# Altium PCB Ad Hoc Radio Node 2005.PCBDOC
Units mm, origin at the board's own origin, x right, y up, seen from the top; angles counter-clockwise.
Board outline 127 x 101.6 mm, 4 copper layers (Top Layer, Internal Plane 1, Internal Plane 2, Bottom Layer); 64 components, 54 nets, 239 pads, 29 vias.
Unrouted connection lines stored in the file: 4.
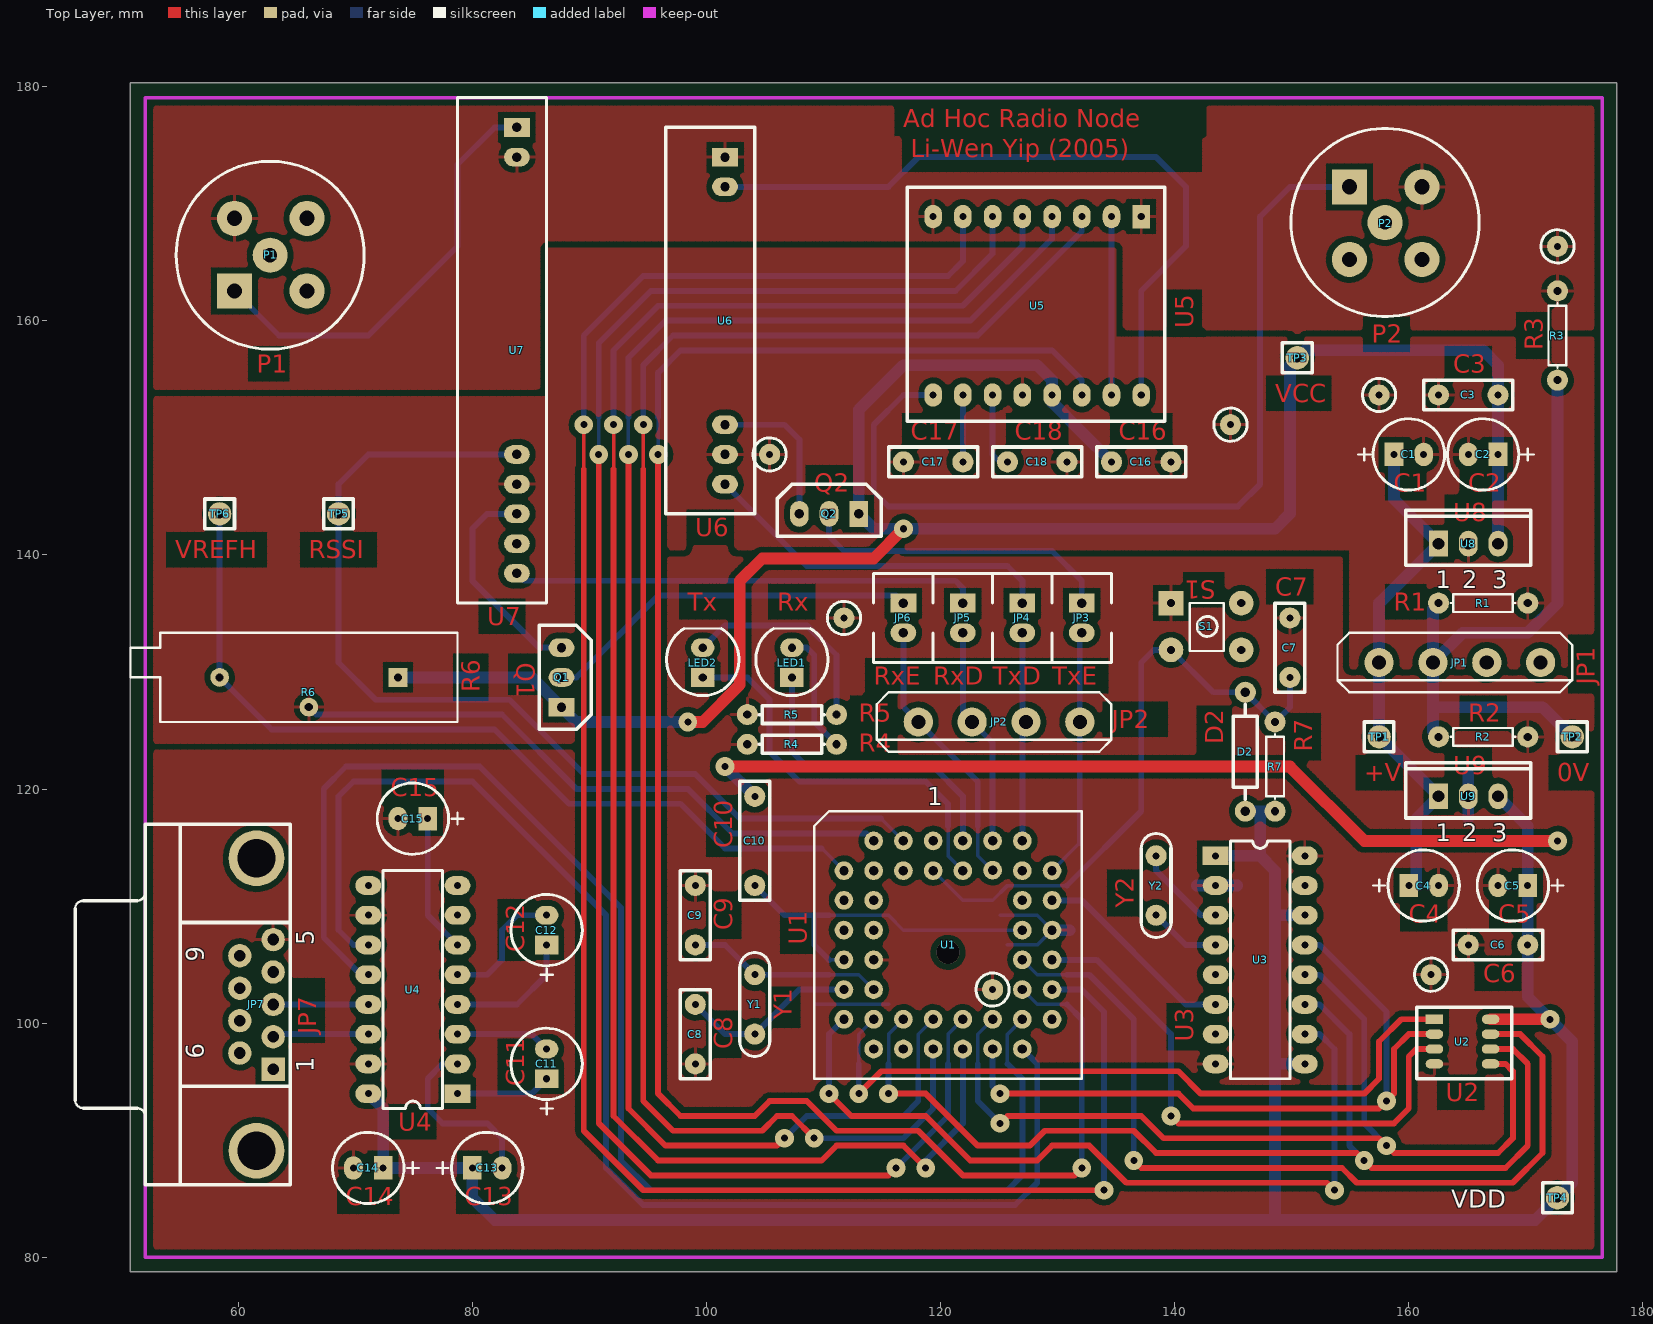
[diagram p0: Top Layer view]
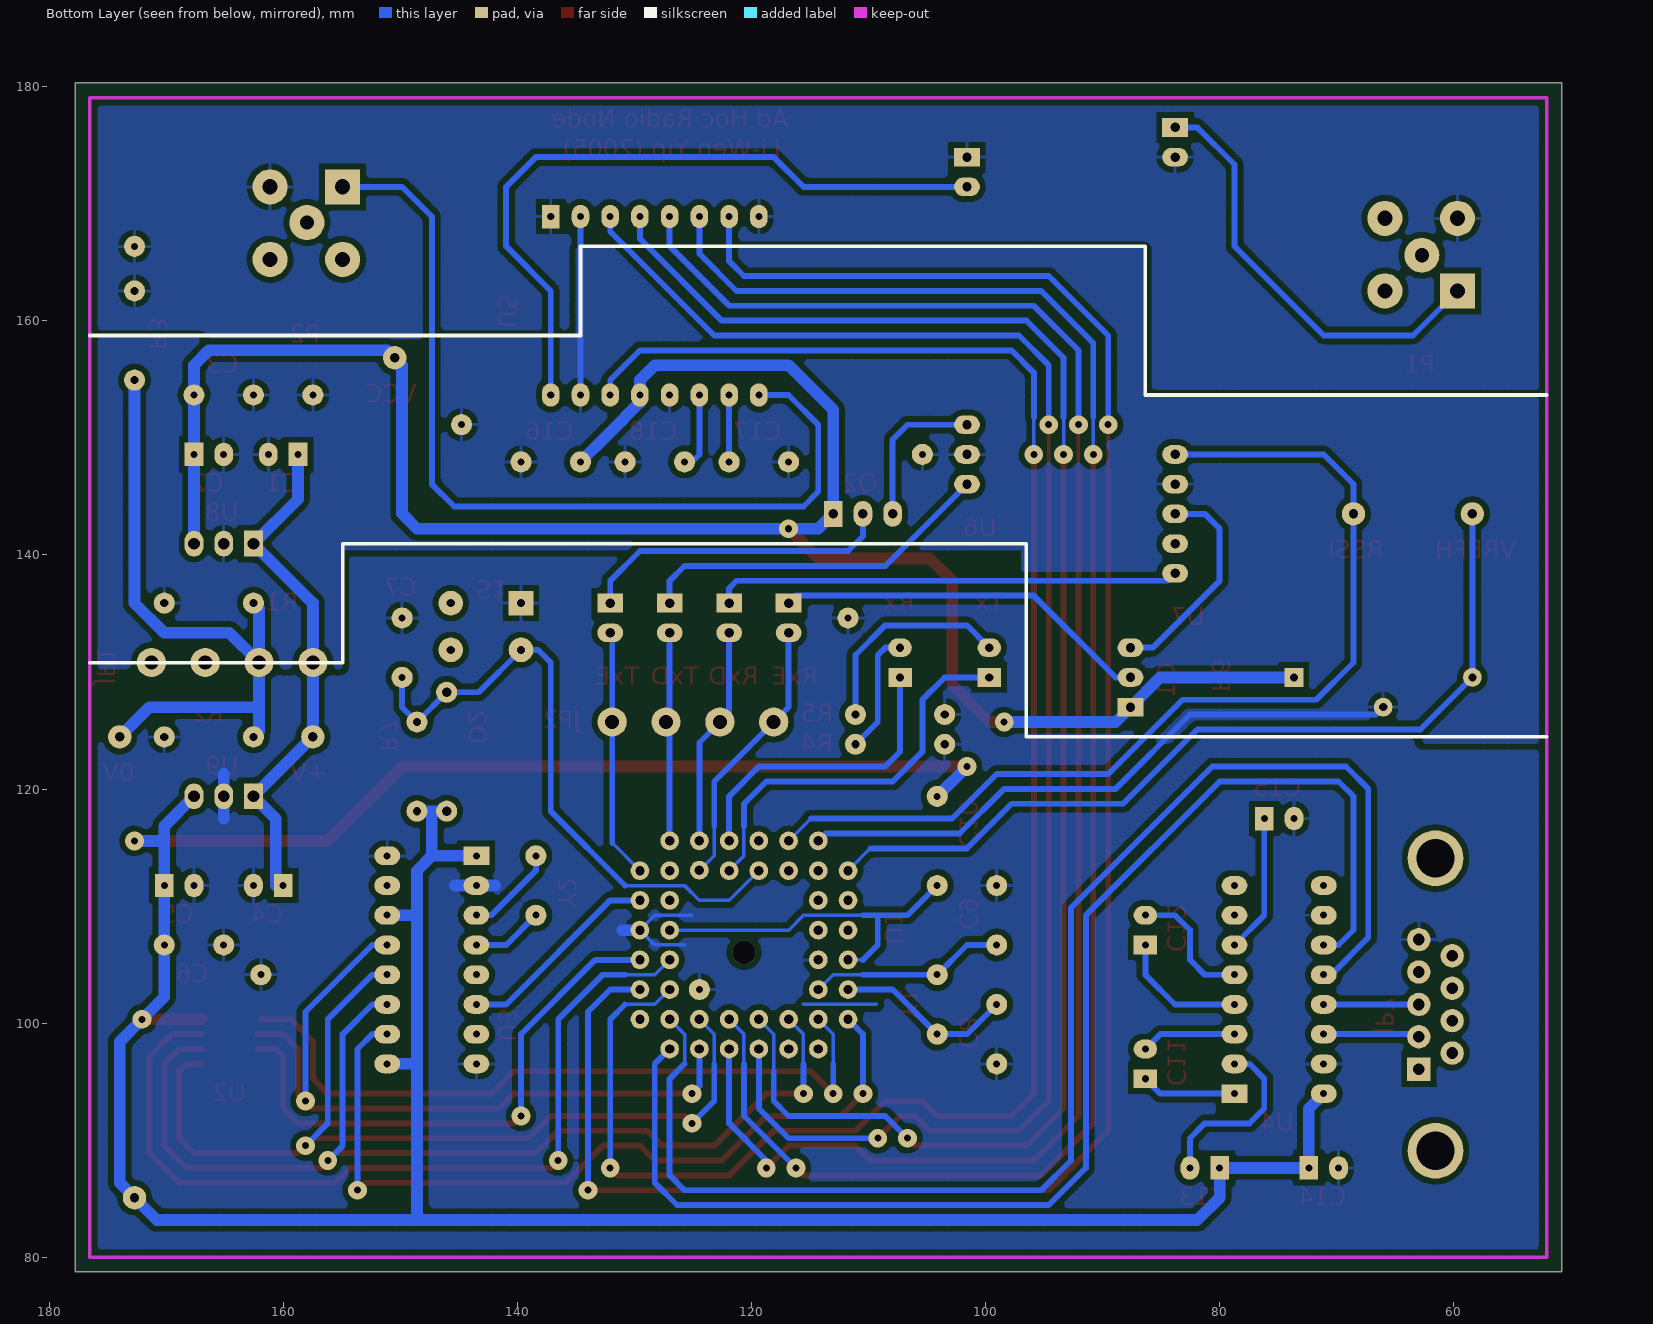
[diagram p1: Bottom Layer view, seen from below]
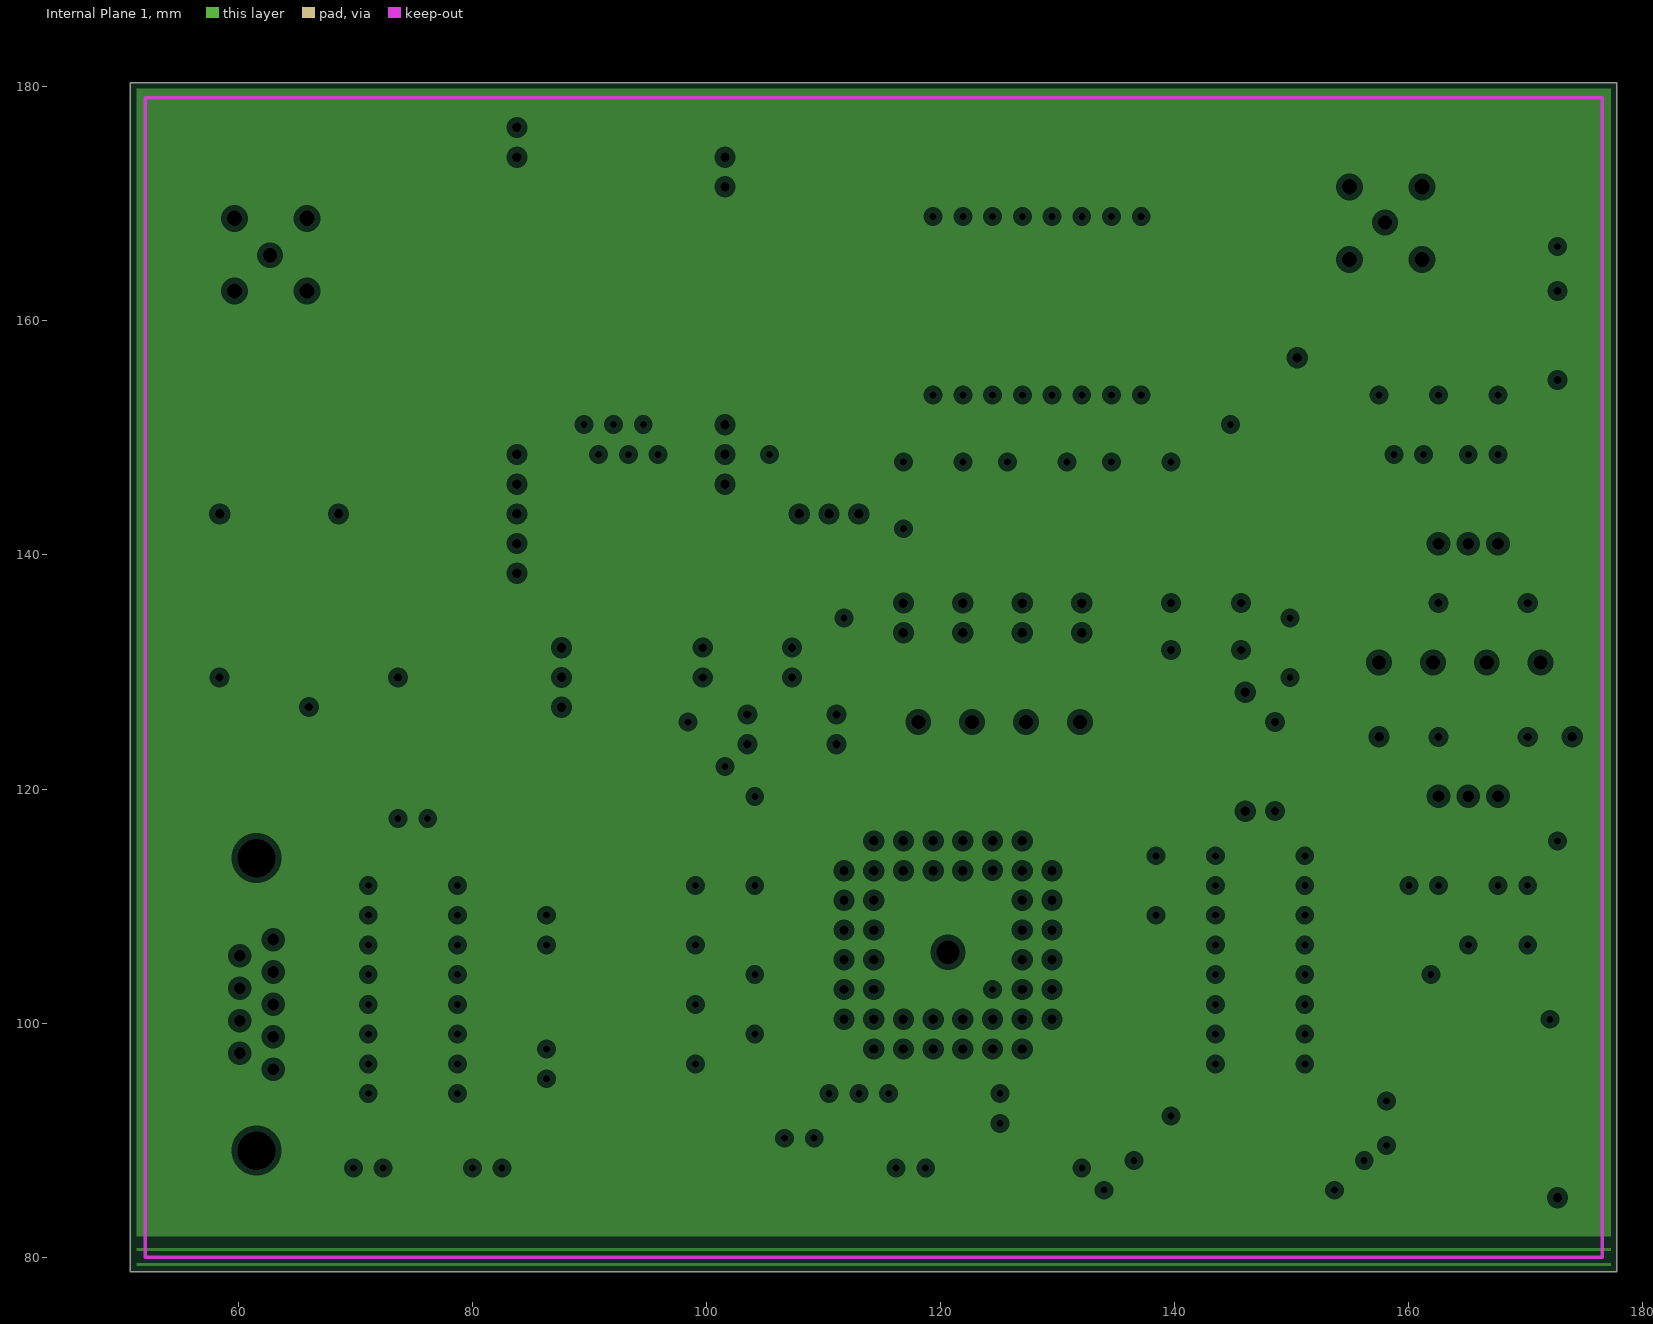
[diagram p2: Internal Plane 1, clearances drawn from the general rule]
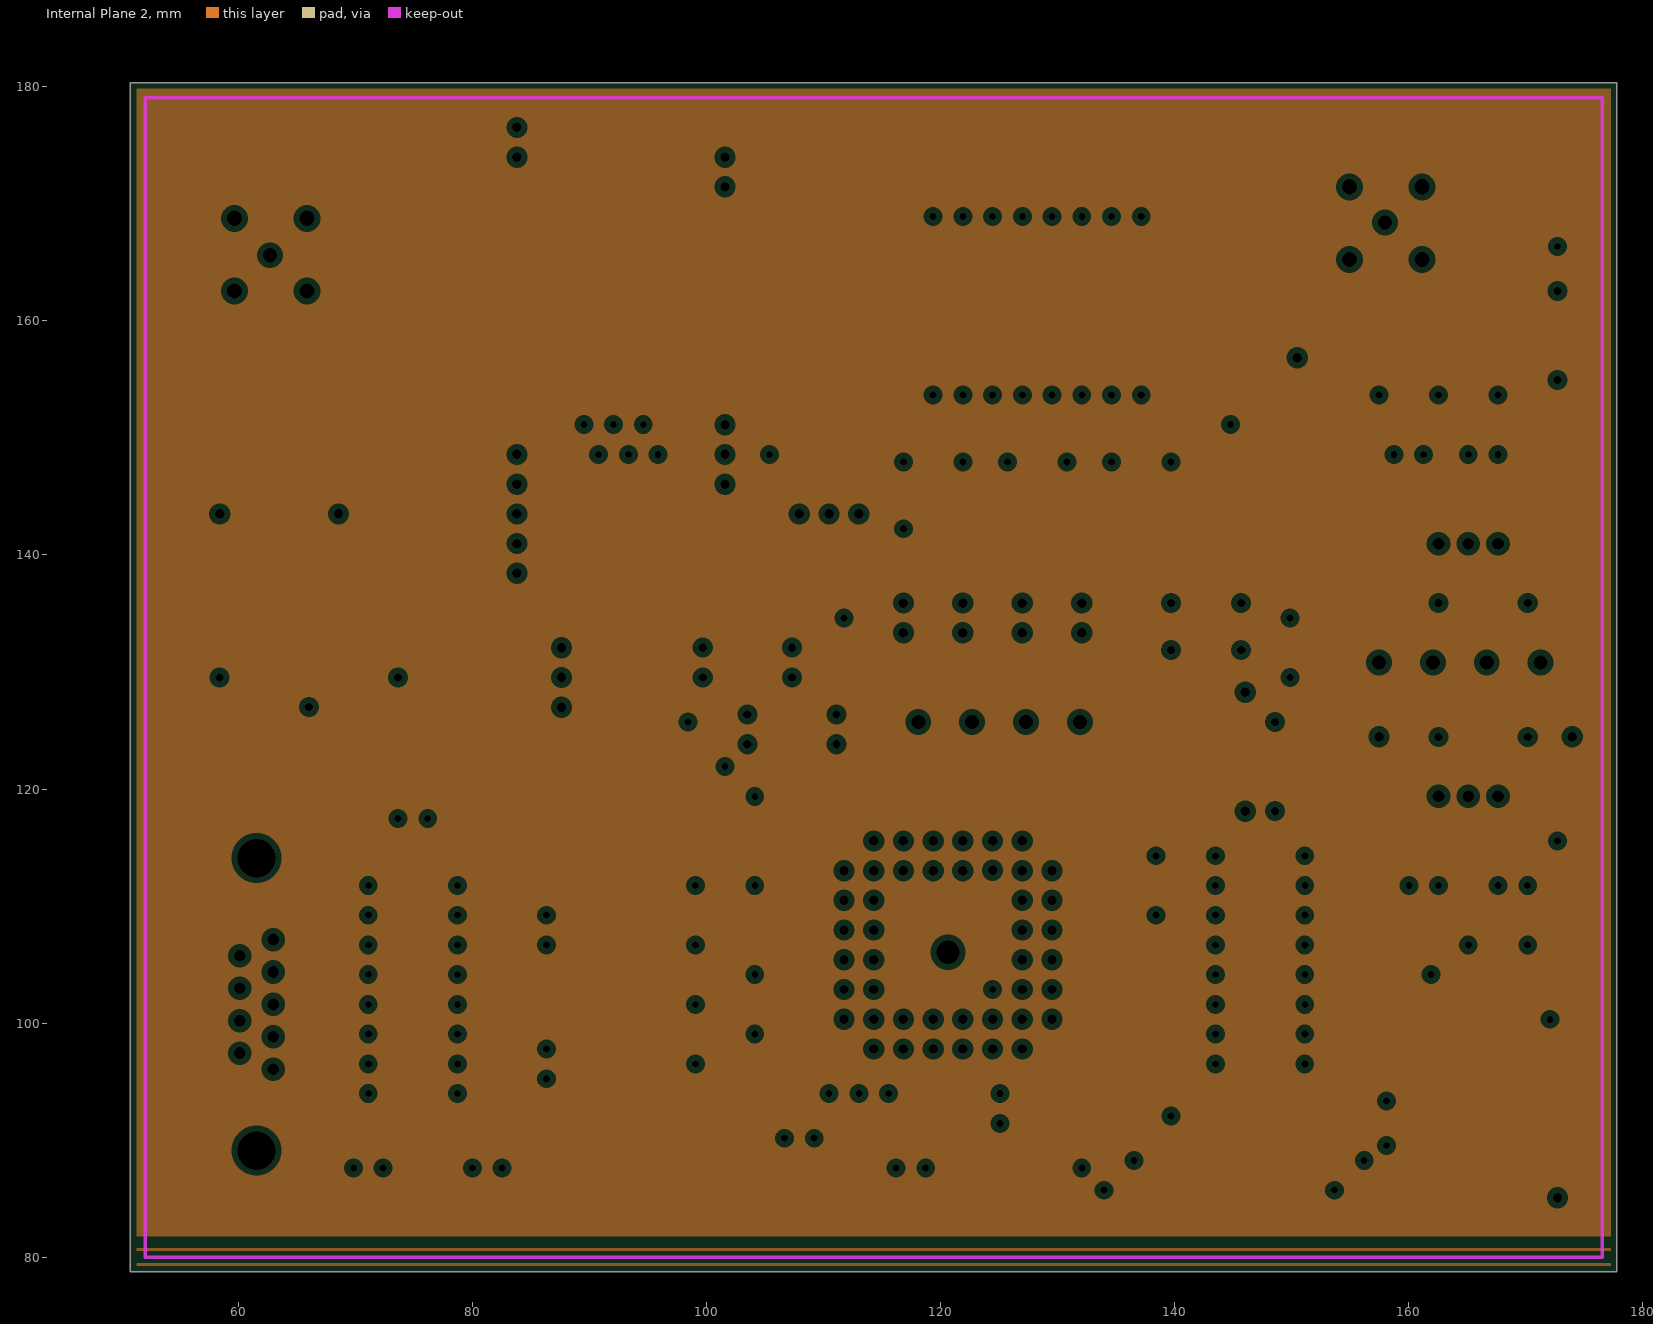
[diagram p3: Internal Plane 2, clearances drawn from the general rule]

## Layer stack, top to bottom
Top Layer: signal copper 0.0356
Dielectric: dielectric 0.32, FR-4, Dk 4.8
Internal Plane 1: plane copper 0.0356
Dielectric: dielectric 0.32, FR-4, Dk 4.8
Internal Plane 2: plane copper 0.0356
Dielectric: dielectric 0.32, FR-4, Dk 4.8
Bottom Layer: signal copper 0.0356

## Board outline
50.8,78.74 177.8,78.74 177.8,180.34 50.8,180.34

## Design rules (kind name [scope] priority, off if disabled: settings)
Clearance [All] p1: gap=0.5
ComponentClearance [All] p1: gap=0.254 collisioncheckmode=0
PlaneClearance [All] p1: clearance=0.508
PlaneConnect [All] p1: planeconnectstyle=Relief reliefexpansion=0.508 reliefentries=4 reliefconductorwidth=0.254 reliefairgap=0.254
PolygonConnect [All] p1: connectstyle=Relief reliefconductorwidth=0.254 reliefentries=4 polygonreliefangle="90 Angle"
RoutingLayers [All] p1: top layer=Horizontal bottom layer=Vertical
RoutingVias [All] p1: holewidth=0.711 width=1.27 viastyle="Through Hole" minholewidth=0.711 minwidth=1.27 maxholewidth=0.711 maxwidth=1.27
SolderMaskExpansion [All] p1: expansion=0.102
TestPointUsage [All] p1: valid=0 allowmultiple=FALSE
Testpoint [All] p1: side=15 testpointundercomponent=TRUE minsize=1.016 maxsize=2.54 preferedsize=1.524 minholesize=0 maxholesize=1.016 preferedholesize=0.813 testpointgrid=0.025 style=1023 order=1234567890
Width [All] p1: maxlimit=1.27 minlimit=0.3 preferedwidth=0.305 toplayer_prefwidth=0.5 bottomlayer_prefwidth=0.3 minimp=50.000000 maximp=50.000000 favimp=50.000000
14 further rules are at their usual default settings.

## Classes and differential pairs
component class "Ad Hoc Radio Node 2005": C1 C2 C3 C4 C5 C6 C7 C8 C9 C10 C11 C12 C13 C14 C15 C16 C17 C18 D2 JP1 JP2 JP3 JP4 JP5 JP6 JP7 LED1 LED2 P1 P2 Q1 Q2 R1 R2 R3 R4 R5 R6 R7 R9 R10 S1 TP1 TP2 TP3 TP4 TP5 TP6 U1 U2 U3 U4 U5 U6 U7 U8 U9 Y1 Y2

## Components (designator, comment, footprint, x,y, rotation, side; value= is the part's Value field where it differs from the comment)
C1 "Cap" "0.1 ELECTRO CAP" 158.75,148.59 r0 top
C2 "Cap" "0.1 ELECTRO CAP" 167.64,148.59 r180 top
C3 "Cap" "0.2 BOX CAP" 162.56,156.21 r180 top
C4 "Cap" "0.1 RAD CAP" 160.02,111.76 r0 top
C5 "Cap" "0.1 RAD CAP" 170.18,111.76 r180 top
C6 "Cap" "0.2 BOX CAP" 165.1,109.22 r180 top
C7 "0.1uF" "0.2 BOX CAP" 152.4,134.62 r90 top
C8 "Cap" "0.2 BOX CAP" 101.6,101.6 r90 top
C9 "Cap" "0.2 BOX CAP" 96.52,106.68 r270 top
C10 "" "0.3 BOX CAP" 101.6,114.3 r270 top
C11 "Cap2" "0.1 RAD CAP" 86.36,95.25 r90 top
C12 "Cap2" "0.1 RAD CAP" 86.36,106.68 r90 top
C13 "Cap2" "0.1 RAD CAP" 80.01,87.63 r0 top
C14 "Cap2" "0.1 RAD CAP" 72.39,87.63 r180 top
C15 "Cap2" "0.1 RAD CAP" 76.2,117.475 r180 top
C16 "" "0.2 BOX CAP" 134.62,150.495 r180 top
C17 "" "0.2 BOX CAP" 116.84,150.495 r180 top
C18 "" "0.2 BOX CAP" 130.81,145.415 r0 top
D2 "1N914" AXIAL-0.4 146.05,123.19 r270 top
JP1 "Header 4" "4 WAY TERMINAL BLOCK" 157.48,130.81 r0 top
JP2 "Header 4" "4 WAY TERMINAL BLOCK" 118.11,125.73 r0 top
JP3 "TxE" PCBCOMPONENT_1 132.08,135.89 r270 top
JP4 "TxD" PCBCOMPONENT_1 127,135.89 r270 top
JP5 "RxD" PCBCOMPONENT_1 121.92,135.89 r270 top
JP6 "RxE" PCBCOMPONENT_1 116.84,135.89 r270 top
JP7 "D Connector 9" DSUB1.385-2H9 52.07,101.6 r90 top
LED1 "Rx" "STD LED" 107.315,129.54 r90 top
LED2 "Tx" "STD LED" 99.695,129.54 r90 top
P1 "BNC" "PCB BNC CONNECTOR - DUPLICATE" 59.69,162.56 r90 top
P2 "BNC" "PCB BNC CONNECTOR - DUPLICATE" 154.94,171.45 r0 top
Q1 "MOSFET-P" MOSFET 87.63,132.08 r90 top
Q2 "MOSFET-P" MOSFET 107.95,143.51 r180 top
R1 "" AXIAL-0.3 166.37,135.89 r0 top
R2 "" AXIAL-0.3 166.37,124.46 r0 top
R3 "" AXIAL-0.3 172.72,158.75 r90 top
R4 "" AXIAL-0.3 107.315,123.825 r180 top
R5 "" AXIAL-0.3 107.315,126.365 r180 top
R6 "Res1" VR2 66.04,128.27 r180 top
R7 "Res1" AXIAL-0.3 148.59,121.92 r270 top
S1 "SW-PB" "RESET SWITCH - DUPLICATE" 139.7,135.89 r0 top
TP1 "+V" TESTPOINT 154.94,124.46 r0 top
TP2 "0V" TESTPOINT 171.45,124.46 r0 top
TP3 "VCC" TESTPOINT 147.955,156.845 r0 top
TP4 "VDD" TESTPOINT 170.18,85.09 r0 top
TP5 "RSSI" TESTPOINT 66.04,143.51 r0 top
TP6 "VREFH" TESTPOINT 55.88,143.51 r0 top
U1 "PIC18C452_PLCC" "PIC18C452_PLCC - DUPLICATE" 111.76,115.57 r0 top
U2 "FRAM" "Ramtron FRAM" 162.205,100.33 r0 top
U3 "DS1306" DIP-16 143.51,114.3 r0 top
U4 "MAX232EPE" DIP-16 78.74,93.98 r180 top
U5 "" DIP16-ADAPTOR 137.16,168.91 r270 top
U6 "T7 NBFM TRANSMITTER" T7 101.6,173.99 r270 top
U7 "R7 NBFM RECEIVER" "R7 NBFM RECEIVER" 83.82,176.53 r270 top
U8 "LM340T5.0" SFM-T3/A4.7V 165.1,140.97 r0 top
U9 "LM340T5.0" SFM-T3/A4.7V 165.1,119.38 r0 top
Y1 "XTAL" XTAL 104.14,99.06 r90 top
Y2 "XTAL" XTAL 138.43,114.3 r270 top
? "" GROUNDVIA 111.76,134.62 r0 top
? "" GROUNDVIA 124.46,102.87 r0 top
? "" GROUNDVIA 161.925,104.14 r0 top
? "" GROUNDVIA 105.41,148.59 r0 top
? "" GROUNDVIA 144.78,151.13 r0 top
? "" GROUNDVIA 157.48,153.67 r0 top
? "" GROUNDVIA 172.72,166.37 r0 top

## Footprints (in the part's own frame and the unit in brackets; to place one, negate y for a bottom-side part, rotate by r counter-clockwise, add the part's x,y. Pads: shape width x height; smd on the part's side, far side on the other; paste and mask are expansions set on the pad)
"0.1 ELECTRO CAP" [mm] "Electrolytic Cap"
  rect 1.6x2 hole 0.6: 1(0,0)
  oval 1.6x2 hole 0.6: 2(2.54,0)
  silkscreen extent -3.05,-3.05 4.32,3.05
"0.1 RAD CAP" [mm] "Electrolytic Cap"
  rect 1.6x2 hole 0.6: 1(0,0)
  oval 1.6x2 hole 0.6: 2(2.54,0)
  silkscreen extent -3.05,-3.05 4.32,3.05
"0.2 BOX CAP" [mm]
  round 1.8 hole 0.6: 1(-5.08,2.54) 2(0,2.54)
  silkscreen extent -6.35,1.27 1.27,3.81
"0.3 BOX CAP" [mm]
  round 1.8 hole 0.6: 1(-5.08,2.54) 2(2.54,2.54)
  silkscreen extent -6.35,1.27 3.81,3.81
"4 WAY TERMINAL BLOCK" [mm]
  round 2.5 hole 1.2: 1(0,0) 2(4.6,0) 3(9.2,0) 4(13.8,0)
  silkscreen extent -3.56,-2.54 16.5,2.54
AXIAL-0.3 [mm]
  round 1.8 hole 0.7: 1(-3.81,0) 2(3.81,0)
  silkscreen extent -2.77,-0.76 2.77,0.76
AXIAL-0.4 [mm]
  round 1.8 hole 0.8: 1(-5.08,0) 2(5.08,0)
  silkscreen extent -4.06,-1.02 4.06,1.02
DIP16-ADAPTOR [mm]
  rect 2x1.5 hole 0.6: 1(0,0)
  oval 2x1.5 hole 0.6: 2(0,-2.54) 3(0,-5.08) 4(0,-7.62) 5(0,-10.16) 6(0,-12.7) 7(0,-15.24) 8(0,-17.78) 9(15.24,-17.78) 10(15.24,-15.24) 11(15.24,-12.7) 12(15.24,-10.16) 13(15.24,-7.62) 14(15.24,-5.08) 15(15.24,-2.54) 16(15.24,0)
  silkscreen extent -2.5,-20 17.5,2
DIP-16 [mm]
  rect 2.2x1.6 hole 0.6: 1(0,0)
  oval 2.2x1.6 hole 0.6: 2(0,-2.54) 3(0,-5.08) 4(0,-7.62) 5(0,-10.16) 6(0,-12.7) 7(0,-15.24) 8(0,-17.78) 9(7.62,-17.78) 10(7.62,-15.24) 11(7.62,-12.7) 12(7.62,-10.16) 13(7.62,-7.62) 14(7.62,-5.08) 15(7.62,-2.54) 16(7.62,0)
  silkscreen extent 1.27,-19.05 6.35,1.27
DSUB1.385-2H9 [mm]
  rect 2x2 hole 1: 1(-5.54,-10.92)
  round 2 hole 1: 2(-2.77,-10.92) 3(0,-10.92) 4(2.77,-10.92) 5(5.54,-10.92) 6(-4.155,-8.08) 7(-1.385,-8.08) 8(1.385,-8.08) 9(4.155,-8.08)
  round 4.76 hole 3.26: 10(-12.495,-9.5) 11(12.495,-9.5)
  silkscreen extent -15.4,-12.4 15.4,6
GROUNDVIA [mm]
  round 1.8 hole 0.6: 1(0,0)
  silkscreen extent -1.42,-1.42 1.42,1.42
MOSFET [mm]
  rect 1.6x2.2 hole 0.8: 1(-5.08,0)
  oval 1.6x2.2 hole 0.8: 2(-2.54,0) 3(0,0)
  silkscreen extent -6.98,-2.54 1.91,1.91
"PCB BNC CONNECTOR - DUPLICATE" [mm]
  round 3 hole 1.2: 0(3.048,-3.048)
  rect 3x3 hole 1.3: 1(0,0)
  round 3 hole 1.3: 2(6.2,0) 3(0,-6.2) 4(6.2,-6.2)
  silkscreen extent -4.98,-11.08 11.08,4.98
PCBCOMPONENT_1 [mm]
  rect 1.6x2.2 hole 0.8: 1(0,0)
  oval 1.6x2.2 hole 0.8: 2(2.54,0)
  silkscreen extent -2.54,-2.54 5.08,2.54
"PIC18C452_PLCC - DUPLICATE" [mm]
  round 1.6 hole 0.8: 1(7.62,0) 2(7.62,-2.54) 3(5.08,0) 4(5.08,-2.54) 5(2.54,0) 6(0,-2.54) 7(2.54,-2.54) 8(0,-5.08) 9(2.54,-5.08) 10(0,-7.62) 11(2.54,-7.62) 12(0,-10.16) 13(2.54,-10.16) 14(0,-12.7) 15(2.54,-12.7) 16(0,-15.24) 17(2.54,-17.78) 18(2.54,-15.24) 19(5.08,-17.78) 20(5.08,-15.24) 21(7.62,-17.78) 22(7.62,-15.24) 23(10.16,-17.78) 24(10.16,-15.24) 25(12.7,-17.78) 26(12.7,-15.24) 27(15.24,-17.78) 28(17.78,-15.24) 29(15.24,-15.24) 30(17.78,-12.7) 31(15.24,-12.7) 32(17.78,-10.16) 33(15.24,-10.16) 34(17.78,-7.62) 35(15.24,-7.62) 36(17.78,-5.08) 37(15.24,-5.08) 38(17.78,-2.54) 39(15.24,0) 40(15.24,-2.54) 41(12.7,0) 42(12.7,-2.5) 43(10.16,0) 44(10.16,-2.54)
  silkscreen extent -2.54,-20.32 20.32,2.54
"R7 NBFM RECEIVER" [mm]
  rect 1.6x2.2 hole 0.8: 1(0,0)
  oval 1.6x2.2 hole 0.8: 2(2.54,0) 3(27.94,0) 4(30.48,0) 5(33.02,0) 6(35.56,0) 7(38.1,0)
  silkscreen extent -2.54,-5.08 40.64,2.54
"Ramtron FRAM" [mm]
  rect 1.5x0.8 smd: 1(0,0)
  oval 1.5x0.8 smd: 2(0,-1.27) 3(0,-2.54) 4(0,-3.81) 5(4.8,-3.81) 6(4.8,-2.54) 7(4.8,-1.27) 8(4.8,0)
  silkscreen extent -1.52,-5.08 6.6,1.02
"RESET SWITCH - DUPLICATE" [mm]
  rect 2.1x2.1 hole 0.7: 1(0,0)
  round 2.1 hole 0.7: 2(0,-4) ""(6,-4) ""(6,0)
  silkscreen extent 1.6,-4.1 4.5,0
SFM-T3/A4.7V [mm]
  rect 1.6x2.2 hole 1: 1(-2.54,0)
  oval 1.6x2.2 hole 1: 2(0,0) 3(2.54,0)
  silkscreen extent -5.35,-1.85 5.35,2.85
"STD LED" [mm]
  rect 1.6x2 hole 0.7: 1(0,0)
  oval 1.6x2 hole 0.7: 2(2.54,0)
  silkscreen extent -1.56,-3.09 4.17,3.09
T7 [mm]
  rect 1.6x2.2 hole 0.8: 1(0,0)
  oval 1.6x2.2 hole 0.8: 2(2.54,0) 3(22.86,0) 4(25.4,0) 5(27.94,0)
  silkscreen extent -2.54,-5.08 30.48,2.54
TESTPOINT [mm] "Test Point"
  round 2 hole 0.8: 1(2.54,0)
  silkscreen extent 1.27,-1.27 3.81,1.27
VR2 [mm]
  rect 1.6x1.6 hole 0.7: 1(-7.62,-1.27)
  round 1.6 hole 0.7: 2(0,1.27) 3(7.62,-1.27)
  silkscreen extent -12.7,-5.08 15.24,2.54
XTAL [mm] "Crystal"
  round 1.8 hole 0.6: 1(0,0) 2(5.08,0)
  silkscreen extent -1.9,-1.27 6.98,1.27

## Part data
C1 C2 C3 C4 C5 C6 C8 C9 C11 C12 C13 C15: "Capacitor"
C7: library part CAP, "Capacitor"
C10 C16 C17 C18: library part Cap, "Capacitor"
C14: library part "Cap Pol1", "Polarized Capacitor (Radial)"
D2: library part Diode, "Default Diode"
JP1 JP2: "Header, 4-Pin"
JP3 JP4 JP5 JP6: library part JUMPER
JP7: "Receptacle Assembly, 9 Position, Right Angle"
LED1 LED2: library part LED2, "Typical RED, GREEN, YELLOW, AMBER GaAs LED"
P1 P2: "BNC Elbow Connector"
Q1 Q2: "P-Channel MOSFET"
R1 R2 R3 R4 R5: library part Res1, "Resistor"
R6: library part RPot2, "Potentiometer"
R7: "Resistor"
S1: "Switch"
TP1 TP2 TP3 TP4 TP5 TP6: library part TESTPOINT, "Test Point"
U4: "+5V Powered RS-232 Driver/Receiver"
U5: library part AD8369_DIGITAL_CONT_PWR_AMP
U8 U9: "Series 3-Terminal Positive Regulator"
Y1 Y2: "Crystal Oscillator"

## Via types
v1: diameter 1.6, hole 0.6, Top Layer to Bottom Layer, 28 vias
v2: diameter 2, hole 2, Top Layer to Bottom Layer, 1 vias

## Nets (pads, with @x,y where several pads share a name; then routed paths per layer and width w, separated by ;. In a path a pad name is that pad's centre, name@x,y a point inside that pad or via, vN(x,y) a via of type N, cw(c..) or ccw(c..) an arc to the next point about the centre after c; other vN are vias at no path point)
0V: JP1.2 R1.1 R2.1 R3.1 TP2.1 | length 56.6
  Bottom Layer w1: 162.08,127 171.45,127 TP2.1 ; JP1.2 164.62,133.35 170.18,133.35 172.72,135.89 R3.1 ; R2.1 162.08,124.94 162.08,135.41 R1.1
B0: U1.21 U5.3 | length 139.6
  Top Layer w0.3: 94.615,147.32 v1(94.615,151.13)
  Top Layer w0.5: 94.615,147.32 94.615,93.345 97.155,90.805 104.775,90.805 106.045,92.075 107.315,92.075 v1(109.22,90.17)
  Bottom Layer w0.5: v1(94.615,151.13) 94.615,156.21 97.155,158.75 123.19,158.75 132.08,167.64 U5.3 ; v1(109.22,90.17) 116.84,90.17 119.38,92.71 U1.21
B1: U1.22 U5.4 | length 141.6
  Top Layer w0.5: v1(93.345,148.59) 93.345,92.71 96.52,89.535 106.045,89.535 v1(106.68,90.17)
  Bottom Layer w0.3: v1(93.345,148.59) 93.345,151.765 ; 118.11,95.885 118.11,99.06 U1.22
  Bottom Layer w0.5: 93.345,151.765 93.345,156.845 96.52,160.02 122.555,160.02 129.54,167.005 U5.4 ; v1(106.68,90.17) 108.585,92.075 116.84,92.075 118.11,93.345 118.11,95.885
B2: U1.23 U5.5 | length 147.6
  Top Layer w0.3: 92.075,147.32 v1(92.075,151.13)
  Top Layer w0.5: 92.075,147.32 92.075,92.075 95.885,88.265 109.855,88.265 111.125,89.535 116.84,89.535 v1(118.745,87.63)
  Bottom Layer w0.5: v1(92.075,151.13) 92.075,157.48 95.885,161.29 121.92,161.29 127,166.37 U5.5 ; v1(118.745,87.63) 118.745,88.265 121.92,91.44 U1.23
B3: U1.24 U5.6 | length 149.2
  Top Layer w0.5: v1(90.805,148.59) 90.805,91.44 95.25,86.995 115.57,86.995 v1(116.205,87.63)
  Bottom Layer w0.3: v1(90.805,148.59) 90.805,151.765 ; 120.65,96.52 120.65,99.06 U1.24
  Bottom Layer w0.5: 90.805,151.765 90.805,158.115 95.25,162.56 121.285,162.56 124.46,165.735 U5.6 ; v1(116.205,87.63) 120.65,92.075 120.65,96.52
C1+: C11.1 U4.1 | length 8.1
  Bottom Layer w0.5: U4.1 85.09,93.98 C11.1
C1-: C11.2 U4.3 | length 8.1
  Bottom Layer w0.5: U4.3 85.09,99.06 C11.2
C2+: C12.1 U4.4 | length 11.2
  Bottom Layer w0.5: U4.4 83.82,101.6 86.36,104.14 C12.1
C2-: C12.2 U4.5 | length 11.2
  Bottom Layer w0.5: U4.5 81.28,104.14 82.55,105.41 82.55,107.95 83.82,109.22 C12.2
DENB: U1.30 U5.7 | length 173.8
  Top Layer w0.3: 89.535,147.32 v1(89.535,151.13)
  Top Layer w0.5: 89.535,147.32 89.535,90.805 94.615,85.725 v1(133.985,85.725)
  Bottom Layer w0.5: v1(89.535,151.13) 89.535,158.75 94.615,163.83 120.65,163.83 121.92,165.1 U5.7 ; U1.30 132.08,102.87 133.985,100.965 v1(133.985,85.725)
FRAM_CS: U1.18 U2.1 | length 61.8
  Top Layer w0.5: v1(113.03,93.98) 114.935,95.885 140.335,95.885 142.24,93.98 156.21,93.98 157.48,95.25 157.48,98.425 159.385,100.33 U2.1@161.925,100.33
  Bottom Layer w0.3: 113.03,96.52 113.03,99.06 U1.18
  Bottom Layer w0.5: v1(113.03,93.98) 113.03,96.52
GND: ?.1@111.76,134.62 ?.1@124.46,102.87 ?.1@161.925,104.14 C4.2 C5.2 C6.2 C7.2 C8.1 C9.1 C14.2 C15.2 JP7.5 R2.2 R4.2 R5.2 S1.1 U1.13 U1.34 U2.4 U3.2 U3.8 U3.16 U4.10 U4.15 U9.2 | length 18.1
  Bottom Layer w0.3: 125.095,109.22 128.27,109.22 U1.34 128.27,106.68 125.73,106.68
  Bottom Layer w1: U1.34 131.039,107.95 ; 141.91,111.76 145.36,111.76 ; 165.1,117.475 165.1,121.295
HOLD: U1.33 U2.7 | length 73.9
  Top Layer w0.5: v1(136.525,88.265) 137.16,87.63 154.305,87.63 155.575,86.36 168.91,86.36 171.45,88.9 171.45,97.155 169.545,99.06 U2.7
  Bottom Layer w0.3: U1.33 128.27,104.14 130.81,104.14
  Bottom Layer w0.5: 130.81,104.14 132.715,104.14 136.525,100.33 v1(136.525,88.265)
INTO: U1.36 U3.6 | length 17.7
  Bottom Layer w0.5: U1.36 132.08,110.49 140.97,101.6 U3.6
MAXRX: U1.29 U4.12 | length 120.9
  Bottom Layer w0.3: 125.73,96.52 125.73,99.06 U1.29
  Bottom Layer w0.5: U4.12 70.485,104.14 67.31,107.315 67.31,120.015 69.215,121.92 80.645,121.92 92.71,109.855 92.71,88.265 95.25,85.725 125.73,85.725 127,86.995 127,95.25 125.73,96.52
MAXTX: U1.27 U4.11 | length 115.1
  Bottom Layer w0.5: U4.11 69.85,106.68 68.58,107.95 68.58,119.38 69.85,120.65 80.01,120.65 91.44,109.22 91.44,87.63 94.615,84.455 126.365,84.455 128.27,86.36 128.27,96.52 U1.27
MCLR: C7.1 D2.1 R7.1 S1.2 U1.2 | length 53.5
  Bottom Layer w0.3: U1.2 121.92,110.49 124.46,110.49 125.73,111.76 130.81,111.76
  Bottom Layer w0.5: 130.81,111.76 137.16,118.11 137.16,130.81 138.24,131.89 S1.2 143.32,128.27 D2.1 R7.1 149.86,127 C7.1
MISO: U1.25 U2.2 U3.13 | length 63.5
  Top Layer w0.5: v1(125.095,93.98) 140.335,93.98 141.605,92.71 157.48,92.71 v1(158.115,93.345) 158.75,93.98 158.75,97.79 160.02,99.06 U2.2
  Bottom Layer w0.5: U1.25 124.46,94.615 v1(125.095,93.98) ; U3.13 152.4,106.68 158.115,100.965 v1(158.115,93.345)
MOSI: U1.26 U2.5 U3.12 | length 82.2
  Top Layer w0.5: v1(125.095,91.44) 125.73,92.075 137.16,92.075 139.065,90.17 157.48,90.17 v1(158.115,89.535) 158.75,88.9 167.64,88.9 168.91,90.17 168.91,95.885 168.275,96.52 U2.5
  Bottom Layer w0.3: 123.19,96.52 123.19,99.06 U1.26
  Bottom Layer w0.5: 123.19,96.52 123.19,93.345 v1(125.095,91.44) ; U3.12 152.4,104.14 156.21,100.33 156.21,91.44 v1(158.115,89.535)
NetC10_2: C10.2 U1.12 U1.35 | length 30.1
  Bottom Layer w0.3: 110.49,105.41 U1.12 ; 110.49,109.22 115.57,109.22 116.84,107.95 U1.35
  Bottom Layer w0.5: C10.2@104.082,111.818 106.68,109.22 109.22,109.22 ; 110.49,105.41 109.22,106.68 109.22,107.95 109.22,109.22 ; 110.49,109.22 109.22,109.22
NetC13_2: C13.2 U4.2 | length 15.5
  Bottom Layer w0.5: U4.2 77.47,96.52 76.2,95.25 76.2,92.71 77.47,91.44 81.28,91.44 82.55,90.17 C13.2
NetC15_1: C15.1 U4.6 | length 11.8
  Bottom Layer w0.5: C15.1 76.2,109.22 U4.6
NetC17_1: C17.1 U5.10 | length 5.7
  Bottom Layer w0.5: C17.1 U5.10
NetC18_1: C18.1 U5.11 | length 6.9
  Bottom Layer w0.5: U5.11 124.46,148.59 C18.1@125.73,147.32
NetLED1_1: LED1.1 U1.43 | length 26.3
  Bottom Layer w0.5: LED1.1 107.315,123.19 108.585,121.92 119.38,121.92 121.92,119.38 U1.43
NetLED1_2: LED1.2 R4.1 | length 10.6
  Bottom Layer w0.5: LED1.2 108.585,132.08 109.22,131.445 109.22,125.73 R4.1
NetLED2_1: LED2.1 U1.44 | length 34.3
  Bottom Layer w0.3: 120.65,116.84 120.65,114.3 U1.44
  Bottom Layer w0.5: LED2.1 100.33,129.54 103.505,129.54 105.41,127.635 105.41,123.19 107.95,120.65 118.745,120.65 120.65,118.745 120.65,116.84
NetLED2_2: LED2.2 R5.1 | length 18.4
  Bottom Layer w0.5: LED2.2 101.6,133.985 108.585,133.985 111.125,131.445 111.125,127.635 R5.1
NetU3_3: U3.3 Y2.1 | length 7.9
  Bottom Layer w0.5: Y2.1 138.43,113.03 142.24,109.22 U3.3
NetU3_4: U3.4 Y2.2 | length 6.1
  Bottom Layer w0.5: Y2.2 140.97,106.68 U3.4
OSC1: C8.2 U1.14 Y1.1 | length 15.3
  Bottom Layer w0.5: C8.2 101.6,99.06 Y1.1 107.95,102.87 U1.14
OSC2: C9.2 U1.15 Y1.2 | length 16.9
  Bottom Layer w0.3: 110.49,104.14 113.03,104.14 U1.15
  Bottom Layer w0.5: C9.2 101.6,106.68 Y1.2 ; Y1.2@104.14,104.06 104.22,104.14 110.49,104.14
PWUP: U1.31 U5.14 | length 160.1
  Top Layer w0.5: v1(95.885,148.59) 95.885,93.98 97.79,92.075 104.14,92.075 105.41,93.345 108.585,93.345 111.125,90.805 118.11,90.805 121.92,86.995 131.445,86.995 v1(132.08,87.63)
  Bottom Layer w0.3: v1(95.885,148.59) 95.885,151.765 ; U1.31 128.27,101.6 130.81,101.6
  Bottom Layer w0.5: 95.885,151.765 95.885,155.575 97.79,157.48 129.54,157.48 132.08,154.94 U5.14 ; 130.81,101.6 132.08,100.33 v1(132.08,87.63)
R1IN: JP7.3 U4.13 | length 8.3
  Bottom Layer w0.5: JP7.3@62.865,101.6 U4.13
RFGND: ?.1@172.72,166.37 P1.2 P2.2 R3.2 U5.1 U5.8 U6.1 U7.2
RSSI: TP5.1 U1.3 U7.3 | length 86.1
  Bottom Layer w0.3: 114.935,117.475 U1.3
  Bottom Layer w0.5: U7.3 71.12,148.59 68.58,146.05 TP5.1 68.58,130.81 71.755,127.635 83.185,127.635 89.535,121.285 99.06,121.285 102.87,117.475 114.935,117.475
RTC_CS: U1.16 U3.10 | length 69.7
  Top Layer w0.5: v1(110.49,93.98) 112.395,92.075 118.745,92.075 122.555,88.265 128.27,88.265 129.54,89.535 132.715,89.535 135.89,86.36 153.035,86.36 v1(153.67,85.725)
  Bottom Layer w0.5: v1(110.49,93.98) 110.49,99.06 U1.16 ; U3.10 152.4,99.06 153.67,97.79 v1(153.67,85.725)
RXD: JP2.2 JP5.1 JP5.2 U1.41 U7.7 | length 58.8
  Bottom Layer w0.5: U7.7 84.455,137.795 121.285,137.795 121.92,137.16 JP5.1 ; JP5.2 121.92,126.365 JP2.2 124.46,123.98 U1.41
RXEN: JP2.1 JP6.1 JP6.2 Q1.2 U1.42 | length 55.8
  Bottom Layer w0.3: 123.19,116.84 123.19,114.3 124.42,113.07 U1.42
  Bottom Layer w0.5: Q1.2 88.9,129.54 95.885,136.525 116.205,136.525 JP6.1 ; JP6.2 116.84,127 123.19,120.65 123.19,116.84
RXPWR: Q1.3 U7.5 | length 18.8
  Bottom Layer w0.5: U7.5 81.28,143.51 80.01,142.24 80.01,137.795 85.725,132.08 Q1.3
RXRF: P1.1 U7.1 | length 37.2
  Bottom Layer w0.5: P1.1 63.5,158.75 71.12,158.75 78.74,166.37 78.74,173.355 81.915,176.53 U7.1
SCLK: U1.20 U2.6 U3.11 | length 92.8
  Top Layer w0.5: v1(115.57,93.98) 118.745,93.98 123.19,89.535 127.635,89.535 128.905,90.805 136.525,90.805 138.43,88.9 155.575,88.9 156.845,87.63 168.275,87.63 170.18,89.535 170.18,96.52 168.91,97.79 U2.6
  Bottom Layer w0.3: 115.57,96.52 115.57,99.06 U1.20
  Bottom Layer w0.5: v1(115.57,93.98) 115.57,96.52 ; U3.11 152.4,101.6 154.94,99.06 154.94,89.535 v1(156.21,88.265)
SGND: ?.1@105.41,148.59 ?.1@144.78,151.13 ?.1@157.48,153.67 C1.2 C2.2 C3.2 C16.1 C17.2 C18.2 R1.2 R6.2 U1.5 U5.2 U5.12 U5.15 U6.4 U7.4 U8.2 | length 68.2
  Bottom Layer w0.5: R6.2 66.675,126.365 82.55,126.365 88.9,120.015 98.425,120.015 102.235,116.205 113.665,116.205 U1.5 ; U5.15 U5.2
SUPPLY: C1.1 C4.1 JP1.1 TP1.1 U8.1 U9.1 | length 43.4
  Bottom Layer w1: C1.1 158.75,144.78 U8.1 157.48,135.89 TP1.1 U9.1 160.655,117.475 C4.1@160.655,111.76
T1OUT: JP7.2 U4.14 | length 8.3
  Bottom Layer w0.5: JP7.2@62.865,99.06 U4.14
TXANT: P2.1 U5.9 | length 77.7
  Bottom Layer w0.5: U5.9 116.84,153.67 114.3,151.13 114.3,145.415 115.57,144.145 145.415,144.145 147.32,146.05 147.32,168.91 149.86,171.45 P2.1
TXD: JP2.3 JP4.1 JP4.2 U1.39 U6.5 | length 48.3
  Bottom Layer w0.5: U6.5 108.585,139.065 125.73,139.065 127,137.795 JP4.1 ; U1.39 127,125.42 JP2.3 ; JP2.3@127,126.04 JP4.2
TXEN: JP2.4 JP3.1 JP3.2 Q2.2 U1.38 | length 48.3
  Bottom Layer w0.3: U1.38 131.91,115.4
  Bottom Layer w0.5: Q2.2 110.49,141.605 111.76,140.335 129.54,140.335 132.08,137.795 JP3.1 ; 131.91,115.4 JP2.4 JP3.2@131.91,133.35
TXPWR: Q2.3 U6.3 | length 13.2
  Bottom Layer w0.5: U6.3 106.68,151.13 107.95,149.86 107.95,147.32 107.95,146.05 Q2.3
TXRFOUT: U5.16 U6.2 | length 60.8
  Bottom Layer w0.5: U6.2 115.57,171.45 118.11,173.99 138.43,173.99 140.97,171.45 140.97,166.37 137.16,162.56 U5.16
VCC: C2.1 C3.1 C16.2 Q1.1 Q2.1 R6.1 TP3.1 U5.13 U8.3 | length 178.1
  Top Layer w1: v1(98.425,125.73) 99.695,125.73 102.87,128.905 102.87,137.795 104.775,139.7 114.3,139.7 v1(116.84,142.24)
  Bottom Layer w1: R6.1 85.09,129.54 Q1.1 88.9,125.73 v1(98.425,125.73) ; C16.2 132.08,150.495 129.54,153.035 U5.13 129.54,154.94 128.27,156.21 116.84,156.21 113.03,152.4 Q2.1 114.3,142.24 148.59,142.24 149.86,143.51 149.86,156.21 151.13,157.48 166.37,157.48 167.64,156.21 C2.1 U8.3
VDD: C5.1 C6.1 C10.1 C13.1 C14.1 D2.2 R7.2 TP4.1 U2.8 U3.1 U3.9 U3.14 U4.16 U9.3 | length 280.6
  Top Layer w1: v1(101.6,121.92) 109.22,121.92 149.86,121.92 156.21,115.57 v1(172.72,115.57) ; U2.8 v1(172.085,100.33)
  Bottom Layer w1: U4.16 72.39,92.71 C14.1 C13.1 80.01,85.09 81.915,83.185 170.815,83.185 173.99,86.36 173.99,98.425 v1(172.085,100.33) 170.18,102.235 C6.1 170.18,116.84 U9.3 ; v1(101.6,121.92) C10.1 ; U3.1 147.32,114.3 ; D2.2 R7.2 ; 147.32,118.11 147.32,114.3 ; 148.59,83.185 148.59,113.03 147.32,114.3 ; 148.59,96.52 U3.9 ; 148.59,109.22 U3.14 ; 170.18,115.57 v1(172.72,115.57)
VREFH: R6.3 TP6.1 U1.6 | length 74.1
  Bottom Layer w0.3: 109.855,114.935 U1.6
  Bottom Layer w0.5: TP6.1 R6.3 62.865,125.095 65.405,125.095 66.675,125.095 67.945,125.095 81.915,125.095 88.265,118.745 97.79,118.745 101.6,114.935 109.855,114.935
WP: U1.32 U2.3 | length 47.8
  Top Layer w0.5: v1(139.7,92.075) 140.335,91.44 158.75,91.44 160.02,92.71 160.02,97.155 160.655,97.79 U2.3
  Bottom Layer w0.5: U1.32 133.35,105.41 139.7,99.06 v1(139.7,92.075)
pads on no net: JP1.3 JP1.4 JP7.1 JP7.4 JP7.6 JP7.7 JP7.8 JP7.9 JP7.10 JP7.11 P1.0 P1.3 P1.4 P2.0 P2.3 P2.4 S1. U1.1 U1.4 U1.7 U1.8 U1.9 U1.10 U1.11 U1.17 U1.19 U1.28 U1.37 U1.40 U3.5 U3.7 U3.15 U4.7 U4.8 U4.9 U7.6
copper on no net: | length 6.9
  Bottom Layer w0.3: 109.33,101.6 115.57,101.6
  Bottom Layer w1: 142.913,111.8 143.47,111.8 143.51,111.76
  other v2: 120.65,106.045

## Polygon pours and split planes (outlines as drawn)
GND on Top Layer (hatched 90Degree grid 0.2 track 0.5, remove dead copper): 52.285,79.67 52.285,124.755 96.735,124.755 96.735,140.66 155.155,140.66 155.155,130.47 176.745,130.47 176.745,79.67
SGND on Top Layer (hatched 90Degree grid 0.2 track 0.5, remove dead copper): 176.745,158.41 134.815,158.41 134.815,166.03 86.575,166.03 86.575,153.33 52.285,153.33 52.285,124.12 96.735,124.12 96.735,140.63 155.155,140.63 155.155,130.47 176.745,130.47
RFGND on Top Layer (hatched 90Degree grid 0.2 track 0.5, remove dead copper): 52.285,178.73 52.285,153.33 86.575,153.33 86.575,166.3 134.815,166.3 134.815,158.66 176.745,158.66 176.745,178.73
SGND on Bottom Layer (hatched 90Degree grid 0.2 track 0.5, remove dead copper): 176.745,158.41 134.815,158.41 134.815,166.03 86.575,166.03 86.575,153.33 52.285,153.33 52.285,124.12 96.735,124.12 96.735,140.63 155.155,140.63 155.155,130.47 176.745,130.47
RFGND on Bottom Layer (hatched 90Degree grid 0.2 track 0.5, remove dead copper): 52.285,178.73 52.285,153.33 86.575,153.33 86.575,166.3 134.815,166.3 134.815,158.66 176.745,158.66 176.745,178.73
GND on Bottom Layer (hatched 90Degree grid 0.2 track 0.5, remove dead copper): 52.285,79.67 52.285,124.755 96.735,124.755 96.735,140.66 155.155,140.66 155.155,130.47 176.745,130.47 176.745,79.67
no net on Internal Plane 1 (split plane): 89.408,182.439 89.408,182.692 215.392,182.692 215.392,182.439
no net on Internal Plane 1 (split plane): 89.408,183.709 89.408,183.962 215.392,183.962 215.392,183.709
no net on Internal Plane 1 (split plane): 89.408,184.979 89.408,283.022 215.392,283.022 215.392,184.979
no net on Internal Plane 1 (split plane): 89.408,284.039 89.408,284.292 215.392,284.292 215.392,284.039
no net on Internal Plane 1 (split plane): 89.408,285.309 89.408,285.562 215.392,285.562 215.392,285.309
no net on Internal Plane 2 (split plane): 89.408,182.439 89.408,182.692 215.392,182.692 215.392,182.439
no net on Internal Plane 2 (split plane): 89.408,183.709 89.408,183.962 215.392,183.962 215.392,183.709
no net on Internal Plane 2 (split plane): 89.408,184.979 89.408,283.022 215.392,283.022 215.392,184.979
no net on Internal Plane 2 (split plane): 89.408,284.039 89.408,284.292 215.392,284.292 215.392,284.039
no net on Internal Plane 2 (split plane): 89.408,285.309 89.408,285.562 215.392,285.562 215.392,285.309

## Keep-outs
Keep-Out Layer:
  lines w0.305: 52.07,80.01 52.07,179.07 176.53,179.07 176.53,80.01 52.07,80.01

## Other copper
Top Layer:
  text "Ad Hoc Radio Node" at 116.84,176.53 h1.52
  text "Li-Wen Yip (2005)" at 117.475,173.99 h1.52

## Silkscreen, mask and mechanical layers (free items; w line width, h text height)
Bottom Overlay:
  lines w0.305: 52.07,124.46 96.52,124.48 96.52,140.97 154.94,140.97 154.94,130.81 176.53,130.81 ; 52.07,153.67 86.36,153.67 86.36,166.37 134.62,166.37 134.62,158.75 176.53,158.75

## Dimensions
52.07,80.01 to 52.07,179.07 on Mechanical 1
52.07,80.01 to 176.53,80.01 on Mechanical 1

## Text inside footprints (layer, text, board x,y; h text height)
JP7: Top Overlay "1" at 66.445,95.81 h1.5 r90; Top Overlay "5" at 66.445,106.64 h1.5 r90; Top Overlay "9" at 57.045,105.255 h1.5 r90; Top Overlay "6" at 57.045,96.945 h1.5 r90
U1: Top Overlay "1" at 118.872,118.618 h1.52
U8: Top Overlay "2" at 164.6,137.145 h1.5; Top Overlay "1" at 162.31,137.145 h1.5; Top Overlay "3" at 167.14,137.145 h1.5
U9: Top Overlay "2" at 164.6,115.555 h1.5; Top Overlay "1" at 162.31,115.555 h1.5; Top Overlay "3" at 167.14,115.555 h1.5